# EAGLE board pirmod (EAGLE 7.2.0)
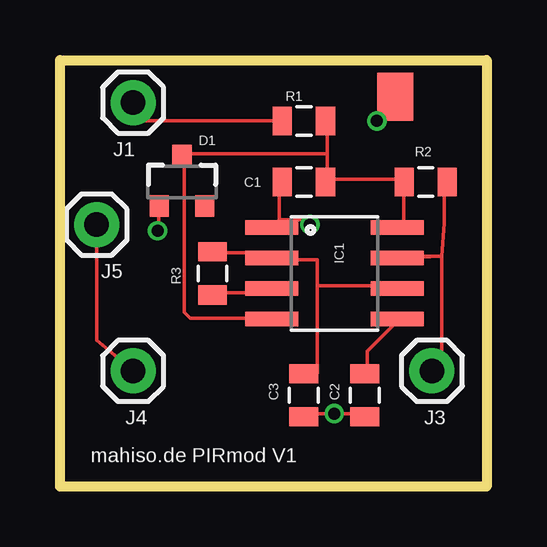
[diagram p0: board, top side]
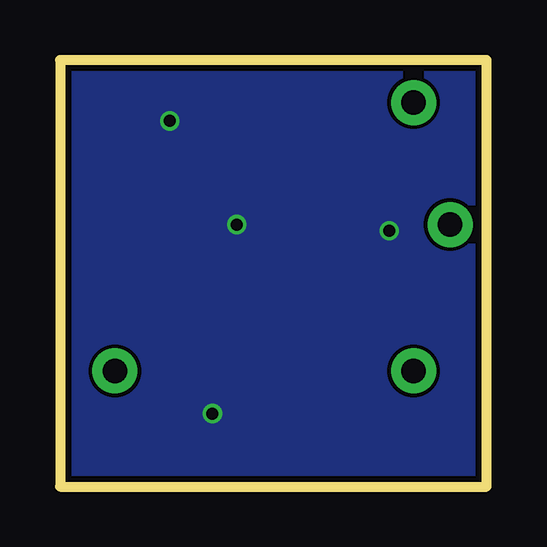
[diagram p1: board, bottom side, seen from below]

Size 17.78 x 17.78 mm. Coordinates in mm from the lower left corner, seen from the top.
Outline: 0,0 0,17.78 17.78,17.78 17.78,0 0,0
Copper layers (1*16): Top 0.035mm / dielectric 1.5mm / Bottom 0.035mm
Design rules "SeeedStudio_2layer_DRU_no_angle_20140221": minimum track width 6mil, minimum drill 12mil, track to track 6mil, track to pad 6mil, pad to pad 6mil, via to via 6mil, smd to smd 0mil, copper to edge 10mil, drill to drill 10mil, minimum pad ring 10mil, minimum via ring 6mil, stop-mask expansion 2mil, vias tented up to drill 100mil, thermal gap 10mil

## Footprints (pad centres in the part's own frame; a part is rotated, then mirrored left to right if it is on the bottom)
0805 = smd 0.8 x 1.2: 1 -0.9,0; 2 0.9,0
SOT23-3 = smd 0.8 x 0.9: 1 -0.95,-1; 2 0.95,-1; 3 0,1.1
SO08 = smd 0.61 x 2.21: 1 -1.905,-2.616; 2 -0.635,-2.616; 3 0.635,-2.616; 4 1.905,-2.616; 5 1.905,2.616; 6 0.635,2.616; 7 -0.635,2.616; 8 -1.905,2.616
1X01 = drill 1.016 pad 1.88: 1 0,0
PAD-1.5X4.5 = smd 1.5 x 2: P$1 0,0

## Placement (x,y rotation side)
C1  100n  [0805]  10.16,12.7 180 top
C2  100n  [0805]  12.7,3.81 270 top
C3  100n  [0805]  10.16,3.81 270 top
D1  BCX84-C12  [SOT23-3]  5.08,12.7 0 top
IC1  TLC555  [SO08]  11.43,8.89 270 top
J1  22V  [1X01]  3.05,16 0 top
J2  GND  [PAD-1.5X4.5]  13.97,16.26 0 top
J3  TACT  [1X01]  15.49,4.83 0 top
J4  OUT-PIR  [1X01]  3.05,4.83 0 top
J5  OUT  [1X01]  1.52,10.92 0 top
R1  2,2k  [0805]  10.16,15.24 0 top
R2  4,7k  [0805]  15.24,12.7 180 top
R3  27k  [0805]  6.35,8.89 270 top

## Library data of the parts
C1-C3 = SparkFun-Capacitors
D1 = SparkFun-DiscreteSemi
IC1 = SparkFun-AnalogIC
J1-J5 = SparkFun-Connectors
R1-R3 = SparkFun-Passives

## Nets
12V: C1.1 D1.3 IC1.4 IC1.8 R1.2 R2.2
GND: C1.2 C2.2 C3.2 D1.1 IC1.1 J2.P$1
N$1: J4.1 J5.1
N$3: C3.1 IC1.2 IC1.6 R3.1
N$5: J1.1 R1.1
N$7: C2.1 IC1.5
N$8: IC1.3 R3.2
N$9: IC1.7 J3.1 R2.1

## Tracks (layer width: path | path; a pad name or v marks a point on that pad's centre or on a via)
12V
  Top 0.152: IC1.8 14.17,10.82 14.33,10.97 14.33,12.65 R2.2 14.33,12.8 11.12,12.8 | 11.12,13.87 11.12,15.24 R1.2 | 11.12,13.87 11.12,12.8 | 11.12,13.87 5.18,13.87 D1.3 5.18,13.72 5.18,7.26 5.44,7.01 8.69,7.01 IC1.4 | 11.12,12.8 C1.1
GND  (via drill 0.5)
  Top 0.152: 9.14,11.12 9.14,12.65 C1.2 | IC1.1 9.14,11.12 | 10.06,2.9 C3.2 | 12.65,2.9 C2.2 12.65,3.05 v11.43,3.05 10.21,3.05 C3.2 | 10.21,2.9 C3.2 | v4.06,10.67 4.12,10.97 4.12,11.58 D1.1 | J2.P$1 13.87,16.15 13.87,15.85 13.26,15.24 v13.21,15.24 | 9.14,11.12 10.21,11.12 v10.41,10.92
  pour Bottom: 0,0 0,17.78 17.78,17.78 17.78,0
N$1
  Top 0.152: J5.1 1.52,6.1 J4.1
N$3
  Top 0.152: 10.72,8.38 10.72,9.45 8.84,9.45 IC1.2 8.69,9.6 8.53,9.75 6.4,9.75 R3.1 | 10.72,8.38 10.72,4.72 C3.1 | 10.72,8.38 14.02,8.38 IC1.6
N$5
  Top 0.152: R1.1 3.35,15.24 3.35,15.7 J1.1
N$7
  Top 0.152: C2.1 12.8,4.72 12.8,5.64 14.02,6.86 IC1.5
N$8
  Top 0.152: R3.2 6.4,8.08 8.53,8.08 8.69,8.23 IC1.3
N$9
  Top 0.152: 15.9,9.6 16,10.97 16,12.65 R2.1 | 15.9,9.6 14.17,9.6 IC1.7 15.9,9.6 | 15.9,9.6 15.9,5.33 15.85,5.33 15.85,5.18 J3.1

## Text on the board
tNames: mahiso.de PIRmod V1